# Altium PCB KUOZHAN.PCBDOC (part 14 of 21)
Units mm, origin at the board's own origin, x right, y up, seen from the top; angles counter-clockwise.
Board outline 165.51 x 116.38 mm, 2 copper layers (Top Layer, Bottom Layer); 171 components, 245 nets, 894 pads, 298 vias.
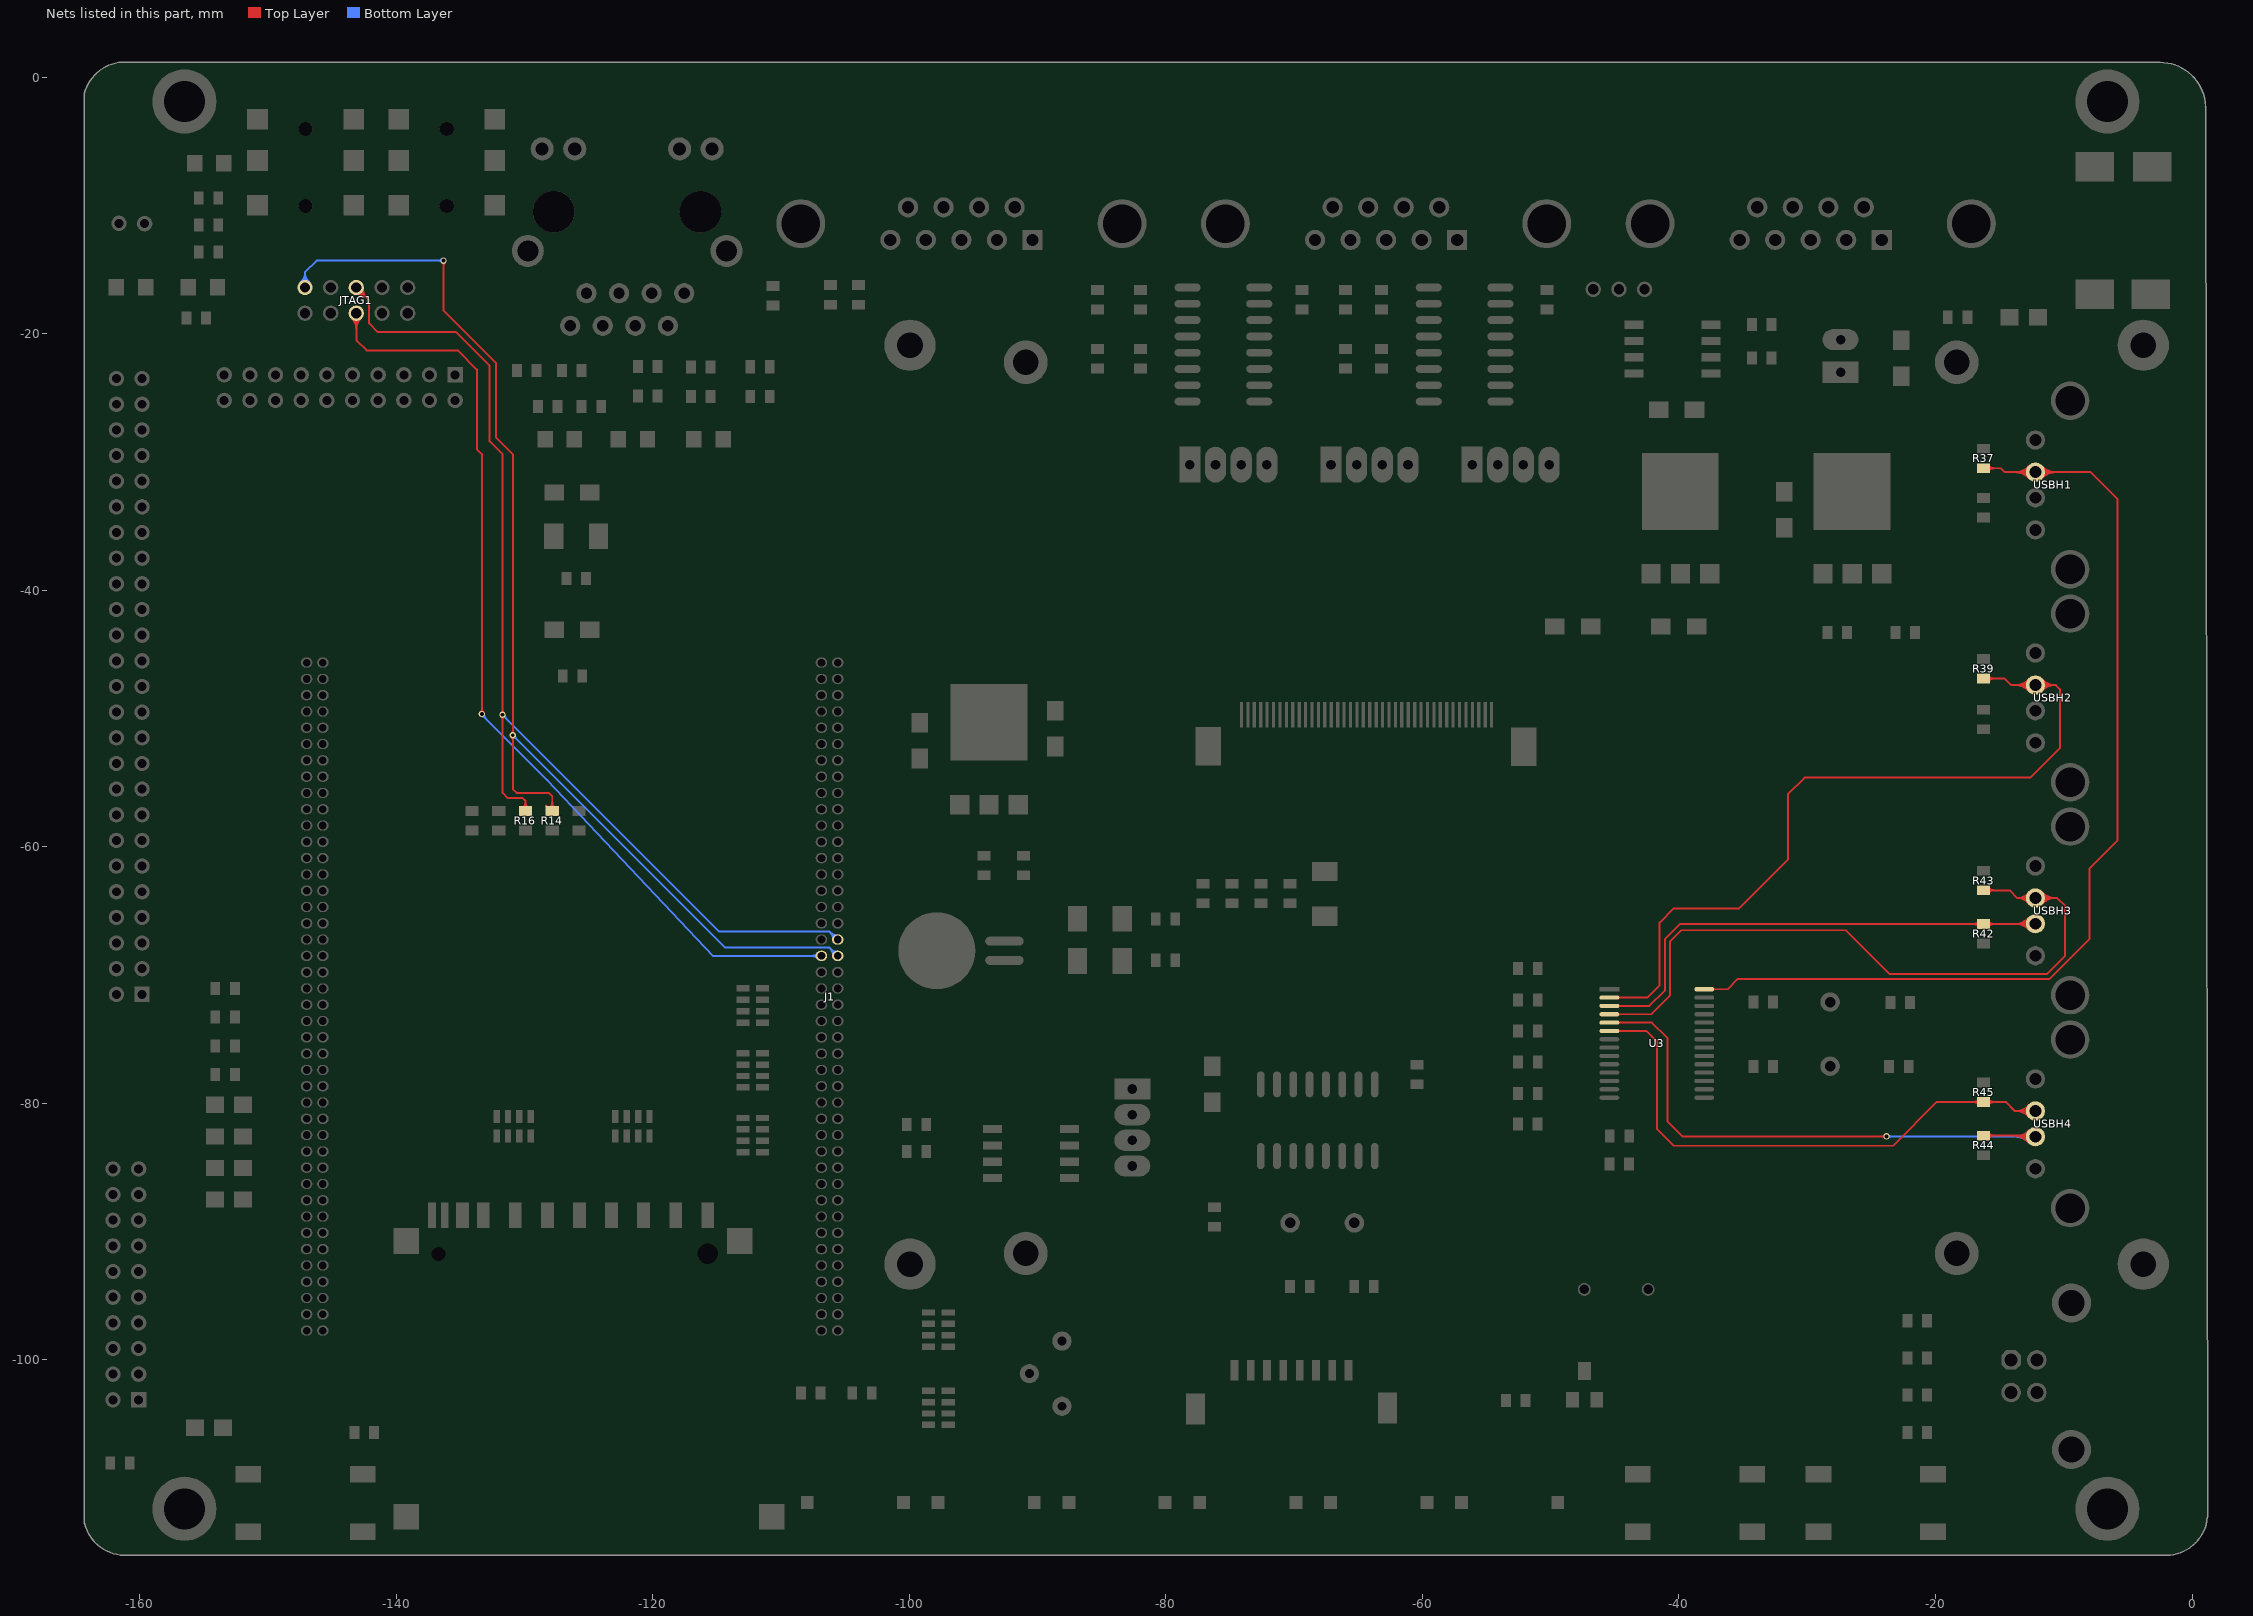
[diagram p14: the nets of this part, all layers, seen from the top]

## Via types
v1: diameter 0.5, hole 0.3, Top Layer to Bottom Layer, 272 vias
v2: diameter 0.6, hole 0.3, Top Layer to Bottom Layer, 24 vias
v3: diameter 0.9, hole 0.9, Top Layer to Bottom Layer, 2 vias

## Nets (pads, with @x,y where several pads share a name; then routed paths per layer and width w, separated by ;. In a path a pad name is that pad's centre, name@x,y a point inside that pad or via, vN(x,y) a via of type N, cw(c..) or ccw(c..) an arc to the next point about the centre after c; other vN are vias at no path point) (continued)
SUB_DM3: R42.1 U3.3 USBH3.2 | length 81.3
  Top Layer w0.15: U3.3@-45.35,-72.4 -42.3,-72.4 -41.1,-71.2 -41.1,-67.2 -39.913,-66.013 -26.713,-66.013 R42.1@-16.24,-66.013 -12.235,-66.013 USBH3.2@-12.213,-65.991 ; U3.3@-44.751,-72.464 cw(c-44.598,-72.617) -44.598,-72.4 cw(c-44.598,-72.183) U3.3@-44.751,-72.336 ; U3.3@-44.746,-72.464 cw(c-44.593,-72.617) -44.593,-72.4 cw(c-44.593,-72.183) U3.3@-44.746,-72.336 ; U3.3@-44.801,-72.464 cw(c-44.648,-72.617) -44.648,-72.4 ; U3.3@-44.801,-72.464 cw(c-44.648,-72.617) -44.648,-72.4 ; U3.3@-44.801,-72.464 cw(c-44.648,-72.617) -44.648,-72.4 ; U3.3@-44.801,-72.336 ccw(c-44.648,-72.183) -44.648,-72.4 ; U3.3@-44.801,-72.336 ccw(c-44.648,-72.183) -44.648,-72.4 ; U3.3@-44.801,-72.336 ccw(c-44.648,-72.183) -44.648,-72.4 ; -17.106,-66.013 cw(c-17.106,-66.751) R42.1@-16.584,-66.229 ; -17.106,-66.013 ccw(c-17.106,-65.274) R42.1@-16.584,-65.796 ; -17.106,-66.013 cw(c-17.106,-66.751) R42.1@-16.584,-66.229 ; -17.106,-66.013 ccw(c-17.106,-65.274) R42.1@-16.584,-65.796 ; -17.106,-66.013 cw(c-17.106,-66.751) R42.1@-16.584,-66.229 ; -17.106,-66.013 ccw(c-17.106,-65.274) R42.1@-16.584,-65.796 ; -17.106,-66.013 cw(c-17.106,-66.751) R42.1@-16.584,-66.229 ; -17.106,-66.013 ccw(c-17.106,-65.274) R42.1@-16.584,-65.796 ; -17.106,-66.013 ccw(c-17.106,-65.274) R42.1@-16.584,-65.796 ; -17.106,-66.013 cw(c-17.106,-66.751) R42.1@-16.584,-66.229 ; R42.1@-15.897,-66.229 cw(c-15.375,-66.751) -15.375,-66.013 ; R42.1@-15.897,-66.229 cw(c-15.375,-66.751) -15.375,-66.013 ; R42.1@-15.897,-66.229 cw(c-15.375,-66.751) -15.375,-66.013 ; R42.1@-15.897,-66.229 cw(c-15.375,-66.751) -15.375,-66.013 ; R42.1@-15.897,-66.229 cw(c-15.375,-66.751) -15.375,-66.013 ; R42.1@-15.897,-65.796 ccw(c-15.375,-65.274) -15.375,-66.013 ; R42.1@-15.897,-65.796 ccw(c-15.375,-65.274) -15.375,-66.013 ; R42.1@-15.897,-65.796 ccw(c-15.375,-65.274) -15.375,-66.013 ; R42.1@-15.897,-65.796 ccw(c-15.375,-65.274) -15.375,-66.013 ; R42.1@-15.897,-65.796 ccw(c-15.375,-65.274) -15.375,-66.013 ; -13.895,-66.013 ccw(c-13.895,-64.31) USBH3.2@-12.691,-65.514 ; -13.895,-66.013 ccw(c-13.895,-64.31) USBH3.2@-12.691,-65.514 ; -13.895,-66.013 ccw(c-13.895,-64.31) USBH3.2@-12.691,-65.514 ; -13.895,-66.013 ccw(c-13.895,-64.31) USBH3.2@-12.691,-65.514 ; -13.895,-66.013 ccw(c-13.895,-64.31) USBH3.2@-12.691,-65.514 ; -13.791,-66.013 cw(c-13.791,-67.569) USBH3.2@-12.691,-66.469 ; -13.791,-66.013 cw(c-13.791,-67.569) USBH3.2@-12.691,-66.469 ; -13.791,-66.013 cw(c-13.791,-67.569) USBH3.2@-12.691,-66.469 ; -13.791,-66.013 cw(c-13.791,-67.569) USBH3.2@-12.691,-66.469 ; -13.791,-66.013 cw(c-13.791,-67.569) USBH3.2@-12.691,-66.469 ; -13.533,-66.013 ccw(c-13.533,-64.672) USBH3.2@-12.585,-65.62 ; -13.533,-66.013 ccw(c-13.533,-64.672) USBH3.2@-12.585,-65.62 ; -13.533,-66.013 ccw(c-13.533,-64.672) USBH3.2@-12.585,-65.62 ; -13.533,-66.013 ccw(c-13.533,-64.672) USBH3.2@-12.585,-65.62 ; -13.533,-66.013 ccw(c-13.533,-64.672) USBH3.2@-12.585,-65.62 ; -13.429,-66.013 cw(c-13.429,-67.207) USBH3.2@-12.585,-66.362 ; -13.429,-66.013 cw(c-13.429,-67.207) USBH3.2@-12.585,-66.362 ; -13.429,-66.013 cw(c-13.429,-67.207) USBH3.2@-12.585,-66.362 ; -13.429,-66.013 cw(c-13.429,-67.207) USBH3.2@-12.585,-66.362 ; -13.429,-66.013 cw(c-13.429,-67.207) USBH3.2@-12.585,-66.362 ; -13.17,-66.013 ccw(c-13.17,-65.034) USBH3.2@-12.479,-65.726 ; -13.17,-66.013 ccw(c-13.17,-65.034) USBH3.2@-12.479,-65.726 ; -13.17,-66.013 ccw(c-13.17,-65.034) USBH3.2@-12.479,-65.726 ; -13.17,-66.013 ccw(c-13.17,-65.034) USBH3.2@-12.479,-65.726 ; -13.17,-66.013 ccw(c-13.17,-65.034) USBH3.2@-12.479,-65.726 ; -13.067,-66.013 cw(c-13.067,-66.845) USBH3.2@-12.479,-66.256 ; -13.067,-66.013 cw(c-13.067,-66.845) USBH3.2@-12.479,-66.256 ; -13.067,-66.013 cw(c-13.067,-66.845) USBH3.2@-12.479,-66.256 ; -13.067,-66.013 cw(c-13.067,-66.845) USBH3.2@-12.479,-66.256 ; -13.067,-66.013 cw(c-13.067,-66.845) USBH3.2@-12.479,-66.256
SUB_DM4: R44.1 U3.5 USBH4.2 | length 115.7
  Top Layer w0.15: U3.5@-45.35,-73.7 -42.1,-73.7 -40.9,-74.9 -40.9,-81.4 -39.726,-82.574 v1(-23.817,-82.574) ; U3.5@-44.751,-73.764 cw(c-44.598,-73.917) -44.598,-73.7 cw(c-44.598,-73.483) U3.5@-44.751,-73.636 ; U3.5@-44.746,-73.764 cw(c-44.593,-73.917) -44.593,-73.7 cw(c-44.593,-73.483) U3.5@-44.746,-73.636 ; v1@-23.906,-82.662 ccw(c-24.119,-82.876) -24.119,-82.574 ccw(c-24.119,-82.272) v1@-23.906,-82.485 ; R44.1@-16.24,-82.513 -12.292,-82.513 USBH4.2@-12.213,-82.591 ; U3.5@-44.801,-73.764 cw(c-44.648,-73.917) -44.648,-73.7 ; U3.5@-44.801,-73.764 cw(c-44.648,-73.917) -44.648,-73.7 ; U3.5@-44.801,-73.764 cw(c-44.648,-73.917) -44.648,-73.7 ; U3.5@-44.801,-73.636 ccw(c-44.648,-73.483) -44.648,-73.7 ; U3.5@-44.801,-73.636 ccw(c-44.648,-73.483) -44.648,-73.7 ; U3.5@-44.801,-73.636 ccw(c-44.648,-73.483) -44.648,-73.7 ; -24.24,-82.574 cw(c-24.24,-82.996) v1@-23.941,-82.697 ; -24.24,-82.574 ccw(c-24.24,-82.151) v1@-23.941,-82.45 ; -24.24,-82.574 cw(c-24.24,-82.996) v1@-23.941,-82.697 ; -24.24,-82.574 ccw(c-24.24,-82.151) v1@-23.941,-82.45 ; -24.24,-82.574 cw(c-24.24,-82.996) v1@-23.941,-82.697 ; -24.24,-82.574 ccw(c-24.24,-82.151) v1@-23.941,-82.45 ; -24.24,-82.574 ccw(c-24.24,-82.151) v1@-23.941,-82.45 ; -24.24,-82.574 cw(c-24.24,-82.996) v1@-23.941,-82.697 ; R44.1@-15.897,-82.729 cw(c-15.375,-83.251) -15.375,-82.513 ; R44.1@-15.897,-82.729 cw(c-15.375,-83.251) -15.375,-82.513 ; R44.1@-15.897,-82.729 cw(c-15.375,-83.251) -15.375,-82.513 ; R44.1@-15.897,-82.729 cw(c-15.375,-83.251) -15.375,-82.513 ; R44.1@-15.897,-82.729 cw(c-15.375,-83.251) -15.375,-82.513 ; R44.1@-15.897,-82.296 ccw(c-15.375,-81.774) -15.375,-82.513 ; R44.1@-15.897,-82.296 ccw(c-15.375,-81.774) -15.375,-82.513 ; R44.1@-15.897,-82.296 ccw(c-15.375,-81.774) -15.375,-82.513 ; R44.1@-15.897,-82.296 ccw(c-15.375,-81.774) -15.375,-82.513 ; R44.1@-15.897,-82.296 ccw(c-15.375,-81.774) -15.375,-82.513 ; -14.033,-82.513 cw(c-14.033,-84.411) USBH4.2@-12.691,-83.069 ; -14.033,-82.513 cw(c-14.033,-84.411) USBH4.2@-12.691,-83.069 ; -14.033,-82.513 cw(c-14.033,-84.411) USBH4.2@-12.691,-83.069 ; -14.033,-82.513 cw(c-14.033,-84.411) USBH4.2@-12.691,-83.069 ; -14.033,-82.513 cw(c-14.033,-84.411) USBH4.2@-12.691,-83.069 ; -13.671,-82.513 cw(c-13.671,-84.048) USBH4.2@-12.585,-82.962 ; -13.671,-82.513 cw(c-13.671,-84.048) USBH4.2@-12.585,-82.962 ; -13.671,-82.513 cw(c-13.671,-84.048) USBH4.2@-12.585,-82.962 ; -13.671,-82.513 cw(c-13.671,-84.048) USBH4.2@-12.585,-82.962 ; -13.671,-82.513 cw(c-13.671,-84.048) USBH4.2@-12.585,-82.962 ; -13.653,-82.513 ccw(c-13.653,-81.151) USBH4.2@-12.691,-82.114 ; -13.653,-82.513 ccw(c-13.653,-81.151) USBH4.2@-12.691,-82.114 ; -13.653,-82.513 ccw(c-13.653,-81.151) USBH4.2@-12.691,-82.114 ; -13.653,-82.513 ccw(c-13.653,-81.151) USBH4.2@-12.691,-82.114 ; -13.653,-82.513 ccw(c-13.653,-81.151) USBH4.2@-12.691,-82.114 ; -13.309,-82.513 cw(c-13.309,-83.686) USBH4.2@-12.479,-82.856 ; -13.309,-82.513 cw(c-13.309,-83.686) USBH4.2@-12.479,-82.856 ; -13.309,-82.513 cw(c-13.309,-83.686) USBH4.2@-12.479,-82.856 ; -13.309,-82.513 cw(c-13.309,-83.686) USBH4.2@-12.479,-82.856 ; -13.309,-82.513 cw(c-13.309,-83.686) USBH4.2@-12.479,-82.856 ; -13.291,-82.513 ccw(c-13.291,-81.514) USBH4.2@-12.585,-82.22 ; -13.291,-82.513 ccw(c-13.291,-81.514) USBH4.2@-12.585,-82.22 ; -13.291,-82.513 ccw(c-13.291,-81.514) USBH4.2@-12.585,-82.22 ; -13.291,-82.513 ccw(c-13.291,-81.514) USBH4.2@-12.585,-82.22 ; -13.291,-82.513 ccw(c-13.291,-81.514) USBH4.2@-12.585,-82.22
  Bottom Layer w0.15: v1@-23.817,-82.591 -15.787,-82.591 USBH4.2@-12.213,-82.591 ; v1@-23.729,-82.662 cw(c-23.558,-82.833) -23.558,-82.591 ; v1@-23.729,-82.485 ccw(c-23.474,-82.23) -23.474,-82.591 ; v1@-23.694,-82.697 cw(c-23.437,-82.954) -23.437,-82.591 ; v1@-23.694,-82.697 cw(c-23.437,-82.954) -23.437,-82.591 ; v1@-23.694,-82.697 cw(c-23.437,-82.954) -23.437,-82.591 ; v1@-23.694,-82.697 cw(c-23.437,-82.954) -23.437,-82.591 ; v1@-23.694,-82.45 ccw(c-23.353,-82.109) -23.353,-82.591 ; v1@-23.694,-82.45 ccw(c-23.353,-82.109) -23.353,-82.591 ; v1@-23.694,-82.45 ccw(c-23.353,-82.109) -23.353,-82.591 ; v1@-23.694,-82.45 ccw(c-23.353,-82.109) -23.353,-82.591 ; -13.843,-82.591 cw(c-13.843,-84.221) USBH4.2@-12.691,-83.069 ; -13.843,-82.591 ccw(c-13.843,-80.962) USBH4.2@-12.691,-82.114 ; -13.843,-82.591 cw(c-13.843,-84.221) USBH4.2@-12.691,-83.069 ; -13.843,-82.591 ccw(c-13.843,-80.962) USBH4.2@-12.691,-82.114 ; -13.843,-82.591 cw(c-13.843,-84.221) USBH4.2@-12.691,-83.069 ; -13.843,-82.591 ccw(c-13.843,-80.962) USBH4.2@-12.691,-82.114 ; -13.843,-82.591 cw(c-13.843,-84.221) USBH4.2@-12.691,-83.069 ; -13.843,-82.591 ccw(c-13.843,-80.962) USBH4.2@-12.691,-82.114 ; -13.843,-82.591 ccw(c-13.843,-80.962) USBH4.2@-12.691,-82.114 ; -13.843,-82.591 cw(c-13.843,-84.221) USBH4.2@-12.691,-83.069 ; -13.481,-82.591 cw(c-13.481,-83.859) USBH4.2@-12.585,-82.962 ; -13.481,-82.591 ccw(c-13.481,-81.324) USBH4.2@-12.585,-82.22 ; -13.481,-82.591 cw(c-13.481,-83.859) USBH4.2@-12.585,-82.962 ; -13.481,-82.591 ccw(c-13.481,-81.324) USBH4.2@-12.585,-82.22 ; -13.481,-82.591 cw(c-13.481,-83.859) USBH4.2@-12.585,-82.962 ; -13.481,-82.591 ccw(c-13.481,-81.324) USBH4.2@-12.585,-82.22 ; -13.481,-82.591 cw(c-13.481,-83.859) USBH4.2@-12.585,-82.962 ; -13.481,-82.591 ccw(c-13.481,-81.324) USBH4.2@-12.585,-82.22 ; -13.481,-82.591 ccw(c-13.481,-81.324) USBH4.2@-12.585,-82.22 ; -13.481,-82.591 cw(c-13.481,-83.859) USBH4.2@-12.585,-82.962 ; -13.119,-82.591 cw(c-13.119,-83.497) USBH4.2@-12.479,-82.856 ; -13.119,-82.591 ccw(c-13.119,-81.686) USBH4.2@-12.479,-82.326 ; -13.119,-82.591 cw(c-13.119,-83.497) USBH4.2@-12.479,-82.856 ; -13.119,-82.591 ccw(c-13.119,-81.686) USBH4.2@-12.479,-82.326 ; -13.119,-82.591 cw(c-13.119,-83.497) USBH4.2@-12.479,-82.856 ; -13.119,-82.591 ccw(c-13.119,-81.686) USBH4.2@-12.479,-82.326 ; -13.119,-82.591 cw(c-13.119,-83.497) USBH4.2@-12.479,-82.856 ; -13.119,-82.591 ccw(c-13.119,-81.686) USBH4.2@-12.479,-82.326 ; -13.119,-82.591 ccw(c-13.119,-81.686) USBH4.2@-12.479,-82.326 ; -13.119,-82.591 cw(c-13.119,-83.497) USBH4.2@-12.479,-82.856
SUB_DP1: R37.1 U3.28 USBH1.3 | length 145.6
  Top Layer w0.15: U3.28@-38.1,-71.1 -36.2,-71.1 -35.4,-70.3 -11.1,-70.3 -8,-67.2 -8,-61.7 -5.8,-59.5 -5.8,-32.9 -7.909,-30.791 USBH1.3@-12.213,-30.791 -14.609,-30.791 -14.913,-30.487 R37.1@-16.241,-30.487 ; U3.28@-37.406,-71.164 cw(c-37.253,-71.317) -37.253,-71.1 cw(c-37.253,-70.883) U3.28@-37.406,-71.036 ; U3.28@-37.351,-71.164 cw(c-37.198,-71.317) -37.198,-71.1 cw(c-37.198,-70.883) U3.28@-37.351,-71.036 ; U3.28@-37.551,-71.164 cw(c-37.398,-71.317) U3.28@-37.398,-71.1 ; U3.28@-37.551,-71.164 cw(c-37.398,-71.317) U3.28@-37.398,-71.1 ; U3.28@-37.551,-71.164 cw(c-37.398,-71.317) U3.28@-37.398,-71.1 ; U3.28@-37.551,-71.036 ccw(c-37.398,-70.883) U3.28@-37.398,-71.1 ; U3.28@-37.551,-71.036 ccw(c-37.398,-70.883) U3.28@-37.398,-71.1 ; U3.28@-37.551,-71.036 ccw(c-37.398,-70.883) U3.28@-37.398,-71.1 ; R37.1@-15.898,-30.704 cw(c-15.376,-31.226) -15.376,-30.487 ; R37.1@-15.898,-30.704 cw(c-15.376,-31.226) -15.376,-30.487 ; R37.1@-15.898,-30.704 cw(c-15.376,-31.226) -15.376,-30.487 ; R37.1@-15.898,-30.704 cw(c-15.376,-31.226) -15.376,-30.487 ; R37.1@-15.898,-30.704 cw(c-15.376,-31.226) -15.376,-30.487 ; R37.1@-15.898,-30.271 ccw(c-15.376,-29.749) -15.376,-30.487 ; R37.1@-15.898,-30.271 ccw(c-15.376,-29.749) -15.376,-30.487 ; R37.1@-15.898,-30.271 ccw(c-15.376,-29.749) -15.376,-30.487 ; R37.1@-15.898,-30.271 ccw(c-15.376,-29.749) -15.376,-30.487 ; R37.1@-15.898,-30.271 ccw(c-15.376,-29.749) -15.376,-30.487 ; -13.843,-30.791 cw(c-13.843,-32.421) USBH1.3@-12.691,-31.269 ; -13.843,-30.791 ccw(c-13.843,-29.162) USBH1.3@-12.691,-30.314 ; -13.843,-30.791 cw(c-13.843,-32.421) USBH1.3@-12.691,-31.269 ; -13.843,-30.791 ccw(c-13.843,-29.162) USBH1.3@-12.691,-30.314 ; -13.843,-30.791 cw(c-13.843,-32.421) USBH1.3@-12.691,-31.269 ; -13.843,-30.791 ccw(c-13.843,-29.162) USBH1.3@-12.691,-30.314 ; -13.843,-30.791 cw(c-13.843,-32.421) USBH1.3@-12.691,-31.269 ; -13.843,-30.791 ccw(c-13.843,-29.162) USBH1.3@-12.691,-30.314 ; -13.843,-30.791 ccw(c-13.843,-29.162) USBH1.3@-12.691,-30.314 ; -13.843,-30.791 cw(c-13.843,-32.421) USBH1.3@-12.691,-31.269 ; -13.481,-30.791 cw(c-13.481,-32.059) USBH1.3@-12.585,-31.162 ; -13.481,-30.791 ccw(c-13.481,-29.524) USBH1.3@-12.585,-30.42 ; -13.481,-30.791 cw(c-13.481,-32.059) USBH1.3@-12.585,-31.162 ; -13.481,-30.791 ccw(c-13.481,-29.524) USBH1.3@-12.585,-30.42 ; -13.481,-30.791 cw(c-13.481,-32.059) USBH1.3@-12.585,-31.162 ; -13.481,-30.791 ccw(c-13.481,-29.524) USBH1.3@-12.585,-30.42 ; -13.481,-30.791 cw(c-13.481,-32.059) USBH1.3@-12.585,-31.162 ; -13.481,-30.791 ccw(c-13.481,-29.524) USBH1.3@-12.585,-30.42 ; -13.481,-30.791 ccw(c-13.481,-29.524) USBH1.3@-12.585,-30.42 ; -13.481,-30.791 cw(c-13.481,-32.059) USBH1.3@-12.585,-31.162 ; -13.119,-30.791 cw(c-13.119,-31.697) USBH1.3@-12.479,-31.056 ; -13.119,-30.791 ccw(c-13.119,-29.886) USBH1.3@-12.479,-30.526 ; -13.119,-30.791 cw(c-13.119,-31.697) USBH1.3@-12.479,-31.056 ; -13.119,-30.791 ccw(c-13.119,-29.886) USBH1.3@-12.479,-30.526 ; -13.119,-30.791 cw(c-13.119,-31.697) USBH1.3@-12.479,-31.056 ; -13.119,-30.791 ccw(c-13.119,-29.886) USBH1.3@-12.479,-30.526 ; -13.119,-30.791 cw(c-13.119,-31.697) USBH1.3@-12.479,-31.056 ; -13.119,-30.791 ccw(c-13.119,-29.886) USBH1.3@-12.479,-30.526 ; -13.119,-30.791 ccw(c-13.119,-29.886) USBH1.3@-12.479,-30.526 ; -13.119,-30.791 cw(c-13.119,-31.697) USBH1.3@-12.479,-31.056 ; USBH1.3@-11.948,-31.056 cw(c-11.308,-31.697) -11.308,-30.791 ; USBH1.3@-11.948,-31.056 cw(c-11.308,-31.697) -11.308,-30.791 ; USBH1.3@-11.948,-31.056 cw(c-11.308,-31.697) -11.308,-30.791 ; USBH1.3@-11.948,-31.056 cw(c-11.308,-31.697) -11.308,-30.791 ; USBH1.3@-11.948,-31.056 cw(c-11.308,-31.697) -11.308,-30.791 ; USBH1.3@-11.948,-30.526 ccw(c-11.308,-29.886) -11.308,-30.791 ; USBH1.3@-11.948,-30.526 ccw(c-11.308,-29.886) -11.308,-30.791 ; USBH1.3@-11.948,-30.526 ccw(c-11.308,-29.886) -11.308,-30.791 ; USBH1.3@-11.948,-30.526 ccw(c-11.308,-29.886) -11.308,-30.791 ; USBH1.3@-11.948,-30.526 ccw(c-11.308,-29.886) -11.308,-30.791 ; USBH1.3@-11.842,-31.162 cw(c-10.946,-32.059) -10.946,-30.791 ; USBH1.3@-11.842,-31.162 cw(c-10.946,-32.059) -10.946,-30.791 ; USBH1.3@-11.842,-31.162 cw(c-10.946,-32.059) -10.946,-30.791 ; USBH1.3@-11.842,-31.162 cw(c-10.946,-32.059) -10.946,-30.791 ; USBH1.3@-11.842,-31.162 cw(c-10.946,-32.059) -10.946,-30.791 ; USBH1.3@-11.842,-30.42 ccw(c-10.946,-29.524) -10.946,-30.791 ; USBH1.3@-11.842,-30.42 ccw(c-10.946,-29.524) -10.946,-30.791 ; USBH1.3@-11.842,-30.42 ccw(c-10.946,-29.524) -10.946,-30.791 ; USBH1.3@-11.842,-30.42 ccw(c-10.946,-29.524) -10.946,-30.791 ; USBH1.3@-11.842,-30.42 ccw(c-10.946,-29.524) -10.946,-30.791 ; USBH1.3@-11.736,-31.269 cw(c-10.584,-32.421) -10.584,-30.791 ; USBH1.3@-11.736,-31.269 cw(c-10.584,-32.421) -10.584,-30.791 ; USBH1.3@-11.736,-31.269 cw(c-10.584,-32.421) -10.584,-30.791 ; USBH1.3@-11.736,-31.269 cw(c-10.584,-32.421) -10.584,-30.791 ; USBH1.3@-11.736,-31.269 cw(c-10.584,-32.421) -10.584,-30.791 ; USBH1.3@-11.736,-30.314 ccw(c-10.584,-29.162) -10.584,-30.791 ; USBH1.3@-11.736,-30.314 ccw(c-10.584,-29.162) -10.584,-30.791 ; USBH1.3@-11.736,-30.314 ccw(c-10.584,-29.162) -10.584,-30.791 ; USBH1.3@-11.736,-30.314 ccw(c-10.584,-29.162) -10.584,-30.791 ; USBH1.3@-11.736,-30.314 ccw(c-10.584,-29.162) -10.584,-30.791
SUB_DP2: R39.1 U3.2 USBH2.3 | length 126.4
  Top Layer w0.15: U3.2@-45.35,-71.75 -42.45,-71.75 -41.5,-70.8 -41.5,-65.9 -40.4,-64.8 -35.3,-64.8 -31.5,-61 -31.5,-55.9 -30.2,-54.6 -12.6,-54.6 -10.3,-52.3 -10.3,-47.7 -10.609,-47.391 ; U3.2@-44.751,-71.814 cw(c-44.598,-71.967) -44.598,-71.75 cw(c-44.598,-71.533) U3.2@-44.751,-71.686 ; U3.2@-44.746,-71.814 cw(c-44.593,-71.967) -44.593,-71.75 cw(c-44.593,-71.533) U3.2@-44.746,-71.686 ; R39.1@-16.241,-46.887 -14.613,-46.887 -14.109,-47.391 USBH2.3@-12.213,-47.391 -10.609,-47.391 ; U3.2@-44.801,-71.814 cw(c-44.648,-71.967) -44.648,-71.75 ; U3.2@-44.801,-71.814 cw(c-44.648,-71.967) -44.648,-71.75 ; U3.2@-44.801,-71.814 cw(c-44.648,-71.967) -44.648,-71.75 ; U3.2@-44.801,-71.686 ccw(c-44.648,-71.533) -44.648,-71.75 ; U3.2@-44.801,-71.686 ccw(c-44.648,-71.533) -44.648,-71.75 ; U3.2@-44.801,-71.686 ccw(c-44.648,-71.533) -44.648,-71.75 ; R39.1@-15.898,-47.104 cw(c-15.376,-47.626) -15.376,-46.887 ; R39.1@-15.898,-47.104 cw(c-15.376,-47.626) -15.376,-46.887 ; R39.1@-15.898,-47.104 cw(c-15.376,-47.626) -15.376,-46.887 ; R39.1@-15.898,-47.104 cw(c-15.376,-47.626) -15.376,-46.887 ; R39.1@-15.898,-47.104 cw(c-15.376,-47.626) -15.376,-46.887 ; R39.1@-15.898,-46.671 ccw(c-15.376,-46.149) -15.376,-46.887 ; R39.1@-15.898,-46.671 ccw(c-15.376,-46.149) -15.376,-46.887 ; R39.1@-15.898,-46.671 ccw(c-15.376,-46.149) -15.376,-46.887 ; R39.1@-15.898,-46.671 ccw(c-15.376,-46.149) -15.376,-46.887 ; R39.1@-15.898,-46.671 ccw(c-15.376,-46.149) -15.376,-46.887 ; -13.843,-47.391 cw(c-13.843,-49.021) USBH2.3@-12.691,-47.869 ; -13.843,-47.391 ccw(c-13.843,-45.762) USBH2.3@-12.691,-46.914 ; -13.843,-47.391 cw(c-13.843,-49.021) USBH2.3@-12.691,-47.869 ; -13.843,-47.391 ccw(c-13.843,-45.762) USBH2.3@-12.691,-46.914 ; -13.843,-47.391 cw(c-13.843,-49.021) USBH2.3@-12.691,-47.869 ; -13.843,-47.391 ccw(c-13.843,-45.762) USBH2.3@-12.691,-46.914 ; -13.843,-47.391 cw(c-13.843,-49.021) USBH2.3@-12.691,-47.869 ; -13.843,-47.391 ccw(c-13.843,-45.762) USBH2.3@-12.691,-46.914 ; -13.843,-47.391 ccw(c-13.843,-45.762) USBH2.3@-12.691,-46.914 ; -13.843,-47.391 cw(c-13.843,-49.021) USBH2.3@-12.691,-47.869 ; -13.481,-47.391 cw(c-13.481,-48.659) USBH2.3@-12.585,-47.762 ; -13.481,-47.391 ccw(c-13.481,-46.124) USBH2.3@-12.585,-47.02 ; -13.481,-47.391 cw(c-13.481,-48.659) USBH2.3@-12.585,-47.762 ; -13.481,-47.391 ccw(c-13.481,-46.124) USBH2.3@-12.585,-47.02 ; -13.481,-47.391 cw(c-13.481,-48.659) USBH2.3@-12.585,-47.762 ; -13.481,-47.391 ccw(c-13.481,-46.124) USBH2.3@-12.585,-47.02 ; -13.481,-47.391 cw(c-13.481,-48.659) USBH2.3@-12.585,-47.762 ; -13.481,-47.391 ccw(c-13.481,-46.124) USBH2.3@-12.585,-47.02 ; -13.481,-47.391 ccw(c-13.481,-46.124) USBH2.3@-12.585,-47.02 ; -13.481,-47.391 cw(c-13.481,-48.659) USBH2.3@-12.585,-47.762 ; -13.119,-47.391 cw(c-13.119,-48.297) USBH2.3@-12.479,-47.656 ; -13.119,-47.391 ccw(c-13.119,-46.486) USBH2.3@-12.479,-47.126 ; -13.119,-47.391 cw(c-13.119,-48.297) USBH2.3@-12.479,-47.656 ; -13.119,-47.391 ccw(c-13.119,-46.486) USBH2.3@-12.479,-47.126 ; -13.119,-47.391 cw(c-13.119,-48.297) USBH2.3@-12.479,-47.656 ; -13.119,-47.391 ccw(c-13.119,-46.486) USBH2.3@-12.479,-47.126 ; -13.119,-47.391 cw(c-13.119,-48.297) USBH2.3@-12.479,-47.656 ; -13.119,-47.391 ccw(c-13.119,-46.486) USBH2.3@-12.479,-47.126 ; -13.119,-47.391 ccw(c-13.119,-46.486) USBH2.3@-12.479,-47.126 ; -13.119,-47.391 cw(c-13.119,-48.297) USBH2.3@-12.479,-47.656 ; USBH2.3@-11.945,-47.653 cw(c-11.322,-48.263) -11.322,-47.391 ; USBH2.3@-11.945,-47.653 cw(c-11.322,-48.263) -11.322,-47.391 ; USBH2.3@-11.945,-47.653 cw(c-11.322,-48.263) -11.322,-47.391 ; USBH2.3@-11.945,-47.653 cw(c-11.322,-48.263) -11.322,-47.391 ; USBH2.3@-11.945,-47.653 cw(c-11.322,-48.263) -11.322,-47.391 ; USBH2.3@-11.945,-47.129 ccw(c-11.322,-46.519) -11.322,-47.391 ; USBH2.3@-11.945,-47.129 ccw(c-11.322,-46.519) -11.322,-47.391 ; USBH2.3@-11.945,-47.129 ccw(c-11.322,-46.519) -11.322,-47.391 ; USBH2.3@-11.945,-47.129 ccw(c-11.322,-46.519) -11.322,-47.391 ; USBH2.3@-11.945,-47.129 ccw(c-11.322,-46.519) -11.322,-47.391 ; USBH2.3@-11.838,-47.758 cw(c-10.965,-48.612) -10.965,-47.391 ; USBH2.3@-11.838,-47.758 cw(c-10.965,-48.612) -10.965,-47.391 ; USBH2.3@-11.838,-47.758 cw(c-10.965,-48.612) -10.965,-47.391 ; USBH2.3@-11.838,-47.758 cw(c-10.965,-48.612) -10.965,-47.391 ; USBH2.3@-11.838,-47.758 cw(c-10.965,-48.612) -10.965,-47.391 ; USBH2.3@-11.838,-47.024 ccw(c-10.965,-46.17) -10.965,-47.391 ; USBH2.3@-11.838,-47.024 ccw(c-10.965,-46.17) -10.965,-47.391 ; USBH2.3@-11.838,-47.024 ccw(c-10.965,-46.17) -10.965,-47.391 ; USBH2.3@-11.838,-47.024 ccw(c-10.965,-46.17) -10.965,-47.391 ; USBH2.3@-11.838,-47.024 ccw(c-10.965,-46.17) -10.965,-47.391 ; USBH2.3@-11.731,-47.863 cw(c-10.609,-48.961) -10.609,-47.391 ; USBH2.3@-11.731,-47.863 cw(c-10.609,-48.961) -10.609,-47.391 ; USBH2.3@-11.731,-47.863 cw(c-10.609,-48.961) -10.609,-47.391 ; USBH2.3@-11.731,-47.863 cw(c-10.609,-48.961) -10.609,-47.391 ; USBH2.3@-11.731,-47.863 cw(c-10.609,-48.961) -10.609,-47.391 ; USBH2.3@-11.731,-46.919 ccw(c-10.609,-45.822) -10.609,-47.391 ; USBH2.3@-11.731,-46.919 ccw(c-10.609,-45.822) -10.609,-47.391 ; USBH2.3@-11.731,-46.919 ccw(c-10.609,-45.822) -10.609,-47.391 ; USBH2.3@-11.731,-46.919 ccw(c-10.609,-45.822) -10.609,-47.391 ; USBH2.3@-11.731,-46.919 ccw(c-10.609,-45.822) -10.609,-47.391
SUB_DP3: R43.1 U3.4 USBH3.3 | length 114
  Top Layer w0.15: U3.4@-45.35,-73.05 -42.15,-73.05 -40.7,-71.6 -40.7,-67.4 -39.8,-66.5 -27,-66.5 -23.6,-69.9 -11.3,-69.9 -9.9,-68.5 -9.9,-64.6 -10.509,-63.991 USBH3.3@-12.213,-63.991 -13.609,-63.991 ; U3.4@-44.751,-73.114 cw(c-44.598,-73.267) -44.598,-73.05 cw(c-44.598,-72.833) U3.4@-44.751,-72.986 ; U3.4@-44.746,-73.114 cw(c-44.593,-73.267) -44.593,-73.05 cw(c-44.593,-72.833) U3.4@-44.746,-72.986 ; R43.1@-16.241,-63.387 -14.213,-63.387 -13.609,-63.991 ; U3.4@-44.801,-73.114 cw(c-44.648,-73.267) -44.648,-73.05 ; U3.4@-44.801,-73.114 cw(c-44.648,-73.267) -44.648,-73.05 ; U3.4@-44.801,-73.114 cw(c-44.648,-73.267) -44.648,-73.05 ; U3.4@-44.801,-72.986 ccw(c-44.648,-72.833) -44.648,-73.05 ; U3.4@-44.801,-72.986 ccw(c-44.648,-72.833) -44.648,-73.05 ; U3.4@-44.801,-72.986 ccw(c-44.648,-72.833) -44.648,-73.05 ; R43.1@-15.898,-63.604 cw(c-15.376,-64.126) -15.376,-63.387 ; R43.1@-15.898,-63.604 cw(c-15.376,-64.126) -15.376,-63.387 ; R43.1@-15.898,-63.604 cw(c-15.376,-64.126) -15.376,-63.387 ; R43.1@-15.898,-63.604 cw(c-15.376,-64.126) -15.376,-63.387 ; R43.1@-15.898,-63.604 cw(c-15.376,-64.126) -15.376,-63.387 ; R43.1@-15.898,-63.171 ccw(c-15.376,-62.649) -15.376,-63.387 ; R43.1@-15.898,-63.171 ccw(c-15.376,-62.649) -15.376,-63.387 ; R43.1@-15.898,-63.171 ccw(c-15.376,-62.649) -15.376,-63.387 ; R43.1@-15.898,-63.171 ccw(c-15.376,-62.649) -15.376,-63.387 ; R43.1@-15.898,-63.171 ccw(c-15.376,-62.649) -15.376,-63.387 ; -13.609,-63.991 cw(c-13.609,-65.096) USBH3.3@-12.743,-64.41 ; -13.609,-63.991 ccw(c-13.609,-62.887) USBH3.3@-12.743,-63.572 ; -13.609,-63.991 cw(c-13.609,-65.096) USBH3.3@-12.743,-64.41 ; -13.609,-63.991 ccw(c-13.609,-62.887) USBH3.3@-12.743,-63.572 ; -13.609,-63.991 cw(c-13.609,-65.096) USBH3.3@-12.743,-64.41 ; -13.609,-63.991 ccw(c-13.609,-62.887) USBH3.3@-12.743,-63.572 ; -13.609,-63.991 cw(c-13.609,-65.096) USBH3.3@-12.743,-64.41 ; -13.609,-63.991 ccw(c-13.609,-62.887) USBH3.3@-12.743,-63.572 ; -13.609,-63.991 ccw(c-13.609,-62.887) USBH3.3@-12.743,-63.572 ; -13.609,-63.991 cw(c-13.609,-65.096) USBH3.3@-12.743,-64.41 ; -13.299,-63.991 cw(c-13.299,-64.85) USBH3.3@-12.625,-64.317 ; -13.299,-63.991 ccw(c-13.299,-63.132) USBH3.3@-12.625,-63.665 ; -13.299,-63.991 cw(c-13.299,-64.85) USBH3.3@-12.625,-64.317 ; -13.299,-63.991 ccw(c-13.299,-63.132) USBH3.3@-12.625,-63.665 ; -13.299,-63.991 cw(c-13.299,-64.85) USBH3.3@-12.625,-64.317 ; -13.299,-63.991 ccw(c-13.299,-63.132) USBH3.3@-12.625,-63.665 ; -13.299,-63.991 cw(c-13.299,-64.85) USBH3.3@-12.625,-64.317 ; -13.299,-63.991 ccw(c-13.299,-63.132) USBH3.3@-12.625,-63.665 ; -13.299,-63.991 ccw(c-13.299,-63.132) USBH3.3@-12.625,-63.665 ; -13.299,-63.991 cw(c-13.299,-64.85) USBH3.3@-12.625,-64.317 ; -12.989,-63.991 cw(c-12.989,-64.605) USBH3.3@-12.507,-64.224 ; -12.989,-63.991 ccw(c-12.989,-63.378) USBH3.3@-12.507,-63.758 ; -12.989,-63.991 cw(c-12.989,-64.605) USBH3.3@-12.507,-64.224 ; -12.989,-63.991 ccw(c-12.989,-63.378) USBH3.3@-12.507,-63.758 ; -12.989,-63.991 cw(c-12.989,-64.605) USBH3.3@-12.507,-64.224 ; -12.989,-63.991 ccw(c-12.989,-63.378) USBH3.3@-12.507,-63.758 ; -12.989,-63.991 cw(c-12.989,-64.605) USBH3.3@-12.507,-64.224 ; -12.989,-63.991 ccw(c-12.989,-63.378) USBH3.3@-12.507,-63.758 ; -12.989,-63.991 ccw(c-12.989,-63.378) USBH3.3@-12.507,-63.758 ; -12.989,-63.991 cw(c-12.989,-64.605) USBH3.3@-12.507,-64.224 ; USBH3.3@-11.948,-64.256 cw(c-11.308,-64.897) -11.308,-63.991 ; USBH3.3@-11.948,-64.256 cw(c-11.308,-64.897) -11.308,-63.991 ; USBH3.3@-11.948,-64.256 cw(c-11.308,-64.897) -11.308,-63.991 ; USBH3.3@-11.948,-64.256 cw(c-11.308,-64.897) -11.308,-63.991 ; USBH3.3@-11.948,-64.256 cw(c-11.308,-64.897) -11.308,-63.991 ; USBH3.3@-11.948,-63.726 ccw(c-11.308,-63.086) -11.308,-63.991 ; USBH3.3@-11.948,-63.726 ccw(c-11.308,-63.086) -11.308,-63.991 ; USBH3.3@-11.948,-63.726 ccw(c-11.308,-63.086) -11.308,-63.991 ; USBH3.3@-11.948,-63.726 ccw(c-11.308,-63.086) -11.308,-63.991 ; USBH3.3@-11.948,-63.726 ccw(c-11.308,-63.086) -11.308,-63.991 ; USBH3.3@-11.842,-64.362 cw(c-10.946,-65.259) -10.946,-63.991 ; USBH3.3@-11.842,-64.362 cw(c-10.946,-65.259) -10.946,-63.991 ; USBH3.3@-11.842,-64.362 cw(c-10.946,-65.259) -10.946,-63.991 ; USBH3.3@-11.842,-64.362 cw(c-10.946,-65.259) -10.946,-63.991 ; USBH3.3@-11.842,-64.362 cw(c-10.946,-65.259) -10.946,-63.991 ; USBH3.3@-11.842,-63.62 ccw(c-10.946,-62.724) -10.946,-63.991 ; USBH3.3@-11.842,-63.62 ccw(c-10.946,-62.724) -10.946,-63.991 ; USBH3.3@-11.842,-63.62 ccw(c-10.946,-62.724) -10.946,-63.991 ; USBH3.3@-11.842,-63.62 ccw(c-10.946,-62.724) -10.946,-63.991 ; USBH3.3@-11.842,-63.62 ccw(c-10.946,-62.724) -10.946,-63.991 ; USBH3.3@-11.736,-64.469 cw(c-10.584,-65.621) -10.584,-63.991 ; USBH3.3@-11.736,-64.469 cw(c-10.584,-65.621) -10.584,-63.991 ; USBH3.3@-11.736,-64.469 cw(c-10.584,-65.621) -10.584,-63.991 ; USBH3.3@-11.736,-64.469 cw(c-10.584,-65.621) -10.584,-63.991 ; USBH3.3@-11.736,-64.469 cw(c-10.584,-65.621) -10.584,-63.991 ; USBH3.3@-11.736,-63.514 ccw(c-10.584,-62.362) -10.584,-63.991 ; USBH3.3@-11.736,-63.514 ccw(c-10.584,-62.362) -10.584,-63.991 ; USBH3.3@-11.736,-63.514 ccw(c-10.584,-62.362) -10.584,-63.991 ; USBH3.3@-11.736,-63.514 ccw(c-10.584,-62.362) -10.584,-63.991 ; USBH3.3@-11.736,-63.514 ccw(c-10.584,-62.362) -10.584,-63.991
SUB_DP4: R45.1 U3.6 USBH4.3 | length 84.8
  Top Layer w0.15: U3.6@-45.35,-74.35 -42.55,-74.35 -41.7,-75.2 -41.7,-82 -40.4,-83.3 -23.3,-83.3 -19.887,-79.887 R45.1@-16.241,-79.887 -14.513,-79.887 -13.809,-80.591 ; U3.6@-44.751,-74.414 cw(c-44.598,-74.567) -44.598,-74.35 cw(c-44.598,-74.133) U3.6@-44.751,-74.286 ; U3.6@-44.746,-74.414 cw(c-44.593,-74.567) -44.593,-74.35 cw(c-44.593,-74.133) U3.6@-44.746,-74.286 ; USBH4.3@-12.213,-80.591 -13.809,-80.591 ; U3.6@-44.801,-74.414 cw(c-44.648,-74.567) -44.648,-74.35 ; U3.6@-44.801,-74.414 cw(c-44.648,-74.567) -44.648,-74.35 ; U3.6@-44.801,-74.414 cw(c-44.648,-74.567) -44.648,-74.35 ; U3.6@-44.801,-74.286 ccw(c-44.648,-74.133) -44.648,-74.35 ; U3.6@-44.801,-74.286 ccw(c-44.648,-74.133) -44.648,-74.35 ; U3.6@-44.801,-74.286 ccw(c-44.648,-74.133) -44.648,-74.35 ; -17.107,-79.887 cw(c-17.107,-80.626) R45.1@-16.585,-80.104 ; -17.107,-79.887 ccw(c-17.107,-79.149) R45.1@-16.585,-79.671 ; -17.107,-79.887 cw(c-17.107,-80.626) R45.1@-16.585,-80.104 ; -17.107,-79.887 ccw(c-17.107,-79.149) R45.1@-16.585,-79.671 ; -17.107,-79.887 cw(c-17.107,-80.626) R45.1@-16.585,-80.104 ; -17.107,-79.887 ccw(c-17.107,-79.149) R45.1@-16.585,-79.671 ; -17.107,-79.887 cw(c-17.107,-80.626) R45.1@-16.585,-80.104 ; -17.107,-79.887 ccw(c-17.107,-79.149) R45.1@-16.585,-79.671 ; -17.107,-79.887 ccw(c-17.107,-79.149) R45.1@-16.585,-79.671 ; -17.107,-79.887 cw(c-17.107,-80.626) R45.1@-16.585,-80.104 ; R45.1@-15.898,-80.104 cw(c-15.376,-80.626) -15.376,-79.887 ; R45.1@-15.898,-80.104 cw(c-15.376,-80.626) -15.376,-79.887 ; R45.1@-15.898,-80.104 cw(c-15.376,-80.626) -15.376,-79.887 ; R45.1@-15.898,-80.104 cw(c-15.376,-80.626) -15.376,-79.887 ; R45.1@-15.898,-80.104 cw(c-15.376,-80.626) -15.376,-79.887 ; R45.1@-15.898,-79.671 ccw(c-15.376,-79.149) -15.376,-79.887 ; R45.1@-15.898,-79.671 ccw(c-15.376,-79.149) -15.376,-79.887 ; R45.1@-15.898,-79.671 ccw(c-15.376,-79.149) -15.376,-79.887 ; R45.1@-15.898,-79.671 ccw(c-15.376,-79.149) -15.376,-79.887 ; R45.1@-15.898,-79.671 ccw(c-15.376,-79.149) -15.376,-79.887 ; -13.809,-80.591 cw(c-13.809,-82.139) USBH4.3@-12.698,-81.061 ; -13.809,-80.591 ccw(c-13.809,-79.044) USBH4.3@-12.698,-80.121 ; -13.809,-80.591 cw(c-13.809,-82.139) USBH4.3@-12.698,-81.061 ; -13.809,-80.591 ccw(c-13.809,-79.044) USBH4.3@-12.698,-80.121 ; -13.809,-80.591 cw(c-13.809,-82.139) USBH4.3@-12.698,-81.061 ; -13.809,-80.591 ccw(c-13.809,-79.044) USBH4.3@-12.698,-80.121 ; -13.809,-80.591 cw(c-13.809,-82.139) USBH4.3@-12.698,-81.061 ; -13.809,-80.591 ccw(c-13.809,-79.044) USBH4.3@-12.698,-80.121 ; -13.809,-80.591 ccw(c-13.809,-79.044) USBH4.3@-12.698,-80.121 ; -13.809,-80.591 cw(c-13.809,-82.139) USBH4.3@-12.698,-81.061 ; -13.454,-80.591 cw(c-13.454,-81.795) USBH4.3@-12.59,-80.957 ; -13.454,-80.591 ccw(c-13.454,-79.387) USBH4.3@-12.59,-80.226 ; -13.454,-80.591 cw(c-13.454,-81.795) USBH4.3@-12.59,-80.957 ; -13.454,-80.591 ccw(c-13.454,-79.387) USBH4.3@-12.59,-80.226 ; -13.454,-80.591 cw(c-13.454,-81.795) USBH4.3@-12.59,-80.957 ; -13.454,-80.591 ccw(c-13.454,-79.387) USBH4.3@-12.59,-80.226 ; -13.454,-80.591 cw(c-13.454,-81.795) USBH4.3@-12.59,-80.957 ; -13.454,-80.591 ccw(c-13.454,-79.387) USBH4.3@-12.59,-80.226 ; -13.454,-80.591 ccw(c-13.454,-79.387) USBH4.3@-12.59,-80.226 ; -13.454,-80.591 cw(c-13.454,-81.795) USBH4.3@-12.59,-80.957 ; -13.1,-80.591 cw(c-13.1,-81.451) USBH4.3@-12.483,-80.852 ; -13.1,-80.591 ccw(c-13.1,-79.731) USBH4.3@-12.483,-80.33 ; -13.1,-80.591 cw(c-13.1,-81.451) USBH4.3@-12.483,-80.852 ; -13.1,-80.591 ccw(c-13.1,-79.731) USBH4.3@-12.483,-80.33 ; -13.1,-80.591 cw(c-13.1,-81.451) USBH4.3@-12.483,-80.852 ; -13.1,-80.591 ccw(c-13.1,-79.731) USBH4.3@-12.483,-80.33 ; -13.1,-80.591 cw(c-13.1,-81.451) USBH4.3@-12.483,-80.852 ; -13.1,-80.591 ccw(c-13.1,-79.731) USBH4.3@-12.483,-80.33 ; -13.1,-80.591 ccw(c-13.1,-79.731) USBH4.3@-12.483,-80.33 ; -13.1,-80.591 cw(c-13.1,-81.451) USBH4.3@-12.483,-80.852
TCK: J1.38 JTAG1.9 R14.2 | length 147.4
  Top Layer w0.15: v1@-136.388,-14.388 cw(c-136.602,-14.602) -136.3,-14.602 cw(c-135.998,-14.602) v1@-136.212,-14.388 ; v1(-136.3,-14.3) -136.3,-18.2 -132.2,-22.3 -132.2,-28.1 -130.9,-29.4 v1(-130.9,-51.3) -130.9,-55.5 -130.6,-55.8 -128.1,-55.8 -127.825,-56.075 R14.2@-127.825,-57.2 ; v1@-130.988,-51.388 cw(c-131.202,-51.602) -130.9,-51.602 cw(c-130.598,-51.602) v1@-130.812,-51.388 ; v1@-130.988,-51.212 ccw(c-131.202,-50.998) -130.9,-50.998 ccw(c-130.598,-50.998) v1@-130.812,-51.212 ; -128.295,-56.805 R14.2@-127.825,-57.275 ; v1@-136.424,-14.424 cw(c-136.722,-14.722) -136.3,-14.722 ; v1@-136.424,-14.424 cw(c-136.722,-14.722) -136.3,-14.722 ; v1@-136.424,-14.424 cw(c-136.722,-14.722) -136.3,-14.722 ; v1@-136.424,-14.424 cw(c-136.722,-14.722) -136.3,-14.722 ; -136.3,-14.722 cw(c-135.878,-14.722) v1@-136.176,-14.424 ; -136.3,-14.722 cw(c-135.878,-14.722) v1@-136.176,-14.424 ; -136.3,-14.722 cw(c-135.878,-14.722) v1@-136.176,-14.424 ; -136.3,-14.722 cw(c-135.878,-14.722) v1@-136.176,-14.424 ; v1@-131.024,-51.424 cw(c-131.322,-51.722) -130.9,-51.722 ; v1@-131.024,-51.424 cw(c-131.322,-51.722) -130.9,-51.722 ; v1@-131.024,-51.424 cw(c-131.322,-51.722) -130.9,-51.722 ; v1@-131.024,-51.424 cw(c-131.322,-51.722) -130.9,-51.722 ; v1@-131.024,-51.176 ccw(c-131.322,-50.878) -130.9,-50.878 ; v1@-131.024,-51.176 ccw(c-131.322,-50.878) -130.9,-50.878 ; v1@-131.024,-51.176 ccw(c-131.322,-50.878) -130.9,-50.878 ; v1@-131.024,-51.176 ccw(c-131.322,-50.878) -130.9,-50.878 ; -130.9,-51.722 cw(c-130.478,-51.722) v1@-130.776,-51.424 ; -130.9,-51.722 cw(c-130.478,-51.722) v1@-130.776,-51.424 ; -130.9,-51.722 cw(c-130.478,-51.722) v1@-130.776,-51.424 ; -130.9,-51.722 cw(c-130.478,-51.722) v1@-130.776,-51.424 ; -130.9,-50.878 ccw(c-130.478,-50.878) v1@-130.776,-51.176 ; -130.9,-50.878 ccw(c-130.478,-50.878) v1@-130.776,-51.176 ; -130.9,-50.878 ccw(c-130.478,-50.878) v1@-130.776,-51.176 ; -130.9,-50.878 ccw(c-130.478,-50.878) v1@-130.776,-51.176 ; -128.321,-56.779 cw(c-128.548,-57.005) R14.2@-128.243,-57.105 ; -128.321,-56.779 ccw(c-128.032,-56.49) R14.2@-127.987,-56.896 ; -128.321,-56.779 cw(c-128.548,-57.005) R14.2@-128.243,-57.105 ; -128.321,-56.779 ccw(c-128.032,-56.49) R14.2@-127.987,-56.896 ; -128.321,-56.779 cw(c-128.548,-57.005) R14.2@-128.243,-57.105 ; -128.321,-56.779 ccw(c-128.032,-56.49) R14.2@-127.987,-56.896 ; -128.321,-56.779 cw(c-128.548,-57.005) R14.2@-128.243,-57.105 ; -128.321,-56.779 ccw(c-128.032,-56.49) R14.2@-127.987,-56.896 ; -128.321,-56.779 ccw(c-128.032,-56.49) R14.2@-127.987,-56.896 ; -128.321,-56.779 cw(c-128.548,-57.005) R14.2@-128.243,-57.105 ; R14.2@-128.042,-56.984 ccw(c-128.564,-56.461) -127.825,-56.461 ; R14.2@-128.042,-56.984 ccw(c-128.564,-56.461) -127.825,-56.461 ; R14.2@-128.042,-56.984 ccw(c-128.564,-56.461) -127.825,-56.461 ; R14.2@-128.042,-56.984 ccw(c-128.564,-56.461) -127.825,-56.461 ; R14.2@-128.042,-56.984 ccw(c-128.564,-56.461) -127.825,-56.461 ; -127.825,-56.461 ccw(c-127.087,-56.461) R14.2@-127.609,-56.984 ; -127.825,-56.461 ccw(c-127.087,-56.461) R14.2@-127.609,-56.984 ; -127.825,-56.461 ccw(c-127.087,-56.461) R14.2@-127.609,-56.984 ; -127.825,-56.461 ccw(c-127.087,-56.461) R14.2@-127.609,-56.984 ; -127.825,-56.461 ccw(c-127.087,-56.461) R14.2@-127.609,-56.984
  Bottom Layer w0.15: JTAG1.9@-147.099,-16.403 -147.099,-15.199 ; v1@-136.388,-14.388 ccw(c-136.602,-14.602) -136.602,-14.3 ccw(c-136.602,-13.998) v1@-136.388,-14.212 ; v1(-136.3,-14.3) -146.2,-14.3 -147.099,-15.199 ; v1@-130.95,-51.25 v1(-130.9,-51.3) -114.346,-67.854 -106.216,-67.854 J1.38@-105.571,-68.499 ; v1@-130.9,-51.425 cw(c-130.9,-51.727) -130.687,-51.513 cw(c-130.473,-51.3) v1@-130.775,-51.3 ; -106.196,-67.889 J1.38@-105.571,-68.514 ; JTAG1.9@-147.456,-16.018 ccw(c-148.216,-15.199) -147.099,-15.199 ; JTAG1.9@-147.456,-16.018 ccw(c-148.216,-15.199) -147.099,-15.199 ; JTAG1.9@-147.456,-16.018 ccw(c-148.216,-15.199) -147.099,-15.199 ; JTAG1.9@-147.456,-16.018 ccw(c-148.216,-15.199) -147.099,-15.199 ; JTAG1.9@-147.456,-16.018 ccw(c-148.216,-15.199) -147.099,-15.199 ; JTAG1.9@-147.354,-16.128 ccw(c-147.897,-15.543) -147.099,-15.543 ; JTAG1.9@-147.354,-16.128 ccw(c-147.897,-15.543) -147.099,-15.543 ; JTAG1.9@-147.354,-16.128 ccw(c-147.897,-15.543) -147.099,-15.543 ; JTAG1.9@-147.354,-16.128 ccw(c-147.897,-15.543) -147.099,-15.543 ; JTAG1.9@-147.354,-16.128 ccw(c-147.897,-15.543) -147.099,-15.543 ; -147.099,-15.543 ccw(c-146.301,-15.543) JTAG1.9@-146.844,-16.128 ; -147.099,-15.543 ccw(c-146.301,-15.543) JTAG1.9@-146.844,-16.128 ; -147.099,-15.543 ccw(c-146.301,-15.543) JTAG1.9@-146.844,-16.128 ; -147.099,-15.543 ccw(c-146.301,-15.543) JTAG1.9@-146.844,-16.128 ; -147.099,-15.543 ccw(c-146.301,-15.543) JTAG1.9@-146.844,-16.128 ; -147.099,-15.199 ccw(c-145.981,-15.199) JTAG1.9@-146.742,-16.018 ; -147.099,-15.199 ccw(c-145.981,-15.199) JTAG1.9@-146.742,-16.018 ; -147.099,-15.199 ccw(c-145.981,-15.199) JTAG1.9@-146.742,-16.018 ; -147.099,-15.199 ccw(c-145.981,-15.199) JTAG1.9@-146.742,-16.018 ; -147.099,-15.199 ccw(c-145.981,-15.199) JTAG1.9@-146.742,-16.018 ; -136.722,-14.3 cw(c-136.722,-14.722) v1@-136.424,-14.424 ; -136.722,-14.3 ccw(c-136.722,-13.878) v1@-136.424,-14.176 ; -136.722,-14.3 cw(c-136.722,-14.722) v1@-136.424,-14.424 ; -136.722,-14.3 ccw(c-136.722,-13.878) v1@-136.424,-14.176 ; -136.722,-14.3 cw(c-136.722,-14.722) v1@-136.424,-14.424 ; -136.722,-14.3 ccw(c-136.722,-13.878) v1@-136.424,-14.176 ; -136.722,-14.3 ccw(c-136.722,-13.878) v1@-136.424,-14.176 ; -136.722,-14.3 cw(c-136.722,-14.722) v1@-136.424,-14.424 ; v1@-130.9,-51.475 cw(c-130.9,-51.897) -130.601,-51.599 ; v1@-130.9,-51.475 cw(c-130.9,-51.897) -130.601,-51.599 ; v1@-130.9,-51.475 cw(c-130.9,-51.897) -130.601,-51.599 ; v1@-130.9,-51.475 cw(c-130.9,-51.897) -130.601,-51.599 ; v1@-130.725,-51.3 ccw(c-130.303,-51.3) -130.601,-51.599 ; v1@-130.725,-51.3 ccw(c-130.303,-51.3) -130.601,-51.599 ; v1@-130.725,-51.3 ccw(c-130.303,-51.3) -130.601,-51.599 ; v1@-130.725,-51.3 ccw(c-130.303,-51.3) -130.601,-51.599 ; -106.126,-67.959 cw(c-106.68,-68.514) J1.38@-105.896,-68.514 ; -106.126,-67.959 ccw(c-105.571,-67.405) J1.38@-105.571,-68.189 ; -106.126,-67.959 cw(c-106.68,-68.514) J1.38@-105.896,-68.514 ; -106.126,-67.959 ccw(c-105.571,-67.405) J1.38@-105.571,-68.189 ; -106.126,-67.959 cw(c-106.68,-68.514) J1.38@-105.896,-68.514 ; -106.126,-67.959 ccw(c-105.571,-67.405) J1.38@-105.571,-68.189 ; J1.38@-105.946,-68.499 ccw(c-106.851,-68.499) -106.211,-67.859 cw(c-106.851,-68.499) J1.38@-105.946,-68.499 ; J1.38@-105.946,-68.499 ccw(c-106.815,-68.499) -106.2,-67.885 cw(c-106.815,-68.499) J1.38@-105.946,-68.499 ; J1.38@-105.87,-68.215 cw(c-106.168,-68.514) J1.38@-105.746,-68.514 ; J1.38@-105.87,-68.215 ccw(c-105.571,-67.917) J1.38@-105.571,-68.339 ; J1.38@-105.87,-68.215 cw(c-106.168,-68.514) J1.38@-105.746,-68.514 ; J1.38@-105.87,-68.215 ccw(c-105.571,-67.917) J1.38@-105.571,-68.339 ; J1.38@-105.87,-68.215 cw(c-106.168,-68.514) J1.38@-105.746,-68.514 ; J1.38@-105.87,-68.215 ccw(c-105.571,-67.917) J1.38@-105.571,-68.339 ; J1.38@-105.796,-68.499 ccw(c-106.339,-68.499) -105.955,-68.115 cw(c-106.339,-68.499) J1.38@-105.796,-68.499 ; J1.38@-105.796,-68.499 ccw(c-106.303,-68.499) -105.944,-68.141 cw(c-106.303,-68.499) J1.38@-105.796,-68.499 ; J1.38@-105.621,-68.174 cw(c-105.621,-67.51) -106.09,-67.98 ccw(c-105.621,-67.51) J1.38@-105.621,-68.174 ; J1.38@-105.621,-68.174 cw(c-105.621,-67.475) -106.116,-67.969 ccw(c-105.621,-67.475) J1.38@-105.621,-68.174
TDI: J1.36 JTAG1.5 R16.2 | length 125.2
  Top Layer w0.15: JTAG1.5@-143.099,-16.403 -142.1,-17.401 -142.1,-19.2 -141.427,-19.873 -135.327,-19.873 -132.7,-22.5 -132.7,-28.4 -131.7,-29.4 -131.7,-50.9 -131.7,-55.8 -131.3,-56.2 -130.136,-56.2 -129.91,-56.426 R16.2@-129.91,-57.2 ; v1@-131.788,-49.788 cw(c-132.002,-50.002) -131.7,-50.002 cw(c-131.398,-50.002) v1@-131.612,-49.788 ; v1@-131.788,-49.612 ccw(c-132.002,-49.398) -131.7,-49.398 ccw(c-131.398,-49.398) v1@-131.612,-49.612 ; JTAG1.5@-143.099,-16.928 cw(c-143.099,-18.195) -142.203,-17.299 ; JTAG1.5@-143.099,-16.928 cw(c-143.099,-18.195) -142.203,-17.299 ; JTAG1.5@-143.099,-16.928 cw(c-143.099,-18.195) -142.203,-17.299 ; JTAG1.5@-143.099,-16.928 cw(c-143.099,-18.195) -142.203,-17.299 ; JTAG1.5@-143.099,-16.928 cw(c-143.099,-18.195) -142.203,-17.299 ; JTAG1.5@-143.099,-16.778 cw(c-143.099,-17.683) -142.459,-17.043 ; JTAG1.5@-143.099,-16.778 cw(c-143.099,-17.683) -142.459,-17.043 ; JTAG1.5@-143.099,-16.778 cw(c-143.099,-17.683) -142.459,-17.043 ; JTAG1.5@-143.099,-16.778 cw(c-143.099,-17.683) -142.459,-17.043 ; JTAG1.5@-143.099,-16.778 cw(c-143.099,-17.683) -142.459,-17.043 ; JTAG1.5@-142.724,-16.403 ccw(c-141.818,-16.403) -142.459,-17.043 ; JTAG1.5@-142.724,-16.403 ccw(c-141.818,-16.403) -142.459,-17.043 ; JTAG1.5@-142.724,-16.403 ccw(c-141.818,-16.403) -142.459,-17.043 ; JTAG1.5@-142.724,-16.403 ccw(c-141.818,-16.403) -142.459,-17.043 ; JTAG1.5@-142.724,-16.403 ccw(c-141.818,-16.403) -142.459,-17.043 ; JTAG1.5@-142.574,-16.403 ccw(c-141.306,-16.403) -142.203,-17.299 ; JTAG1.5@-142.574,-16.403 ccw(c-141.306,-16.403) -142.203,-17.299 ; JTAG1.5@-142.574,-16.403 ccw(c-141.306,-16.403) -142.203,-17.299 ; JTAG1.5@-142.574,-16.403 ccw(c-141.306,-16.403) -142.203,-17.299 ; JTAG1.5@-142.574,-16.403 ccw(c-141.306,-16.403) -142.203,-17.299 ; v1@-131.824,-49.824 cw(c-132.122,-50.122) -131.7,-50.122 ; v1@-131.824,-49.824 cw(c-132.122,-50.122) -131.7,-50.122 ; v1@-131.824,-49.824 cw(c-132.122,-50.122) -131.7,-50.122 ; v1@-131.824,-49.824 cw(c-132.122,-50.122) -131.7,-50.122 ; v1@-131.824,-49.576 ccw(c-132.122,-49.278) -131.7,-49.278 ; v1@-131.824,-49.576 ccw(c-132.122,-49.278) -131.7,-49.278 ; v1@-131.824,-49.576 ccw(c-132.122,-49.278) -131.7,-49.278 ; v1@-131.824,-49.576 ccw(c-132.122,-49.278) -131.7,-49.278 ; -131.7,-50.122 cw(c-131.278,-50.122) v1@-131.576,-49.824 ; -131.7,-50.122 cw(c-131.278,-50.122) v1@-131.576,-49.824 ; -131.7,-50.122 cw(c-131.278,-50.122) v1@-131.576,-49.824 ; -131.7,-50.122 cw(c-131.278,-50.122) v1@-131.576,-49.824 ; -131.7,-49.278 ccw(c-131.278,-49.278) v1@-131.576,-49.576 ; -131.7,-49.278 ccw(c-131.278,-49.278) v1@-131.576,-49.576 ; -131.7,-49.278 ccw(c-131.278,-49.278) v1@-131.576,-49.576 ; -131.7,-49.278 ccw(c-131.278,-49.278) v1@-131.576,-49.576 ; R16.2@-130.126,-56.984 ccw(c-130.649,-56.461) -129.91,-56.461 ; R16.2@-130.126,-56.984 ccw(c-130.649,-56.461) -129.91,-56.461 ; R16.2@-130.126,-56.984 ccw(c-130.649,-56.461) -129.91,-56.461 ; R16.2@-130.126,-56.984 ccw(c-130.649,-56.461) -129.91,-56.461 ; R16.2@-130.126,-56.984 ccw(c-130.649,-56.461) -129.91,-56.461 ; -129.91,-56.461 ccw(c-129.171,-56.461) R16.2@-129.694,-56.984 ; -129.91,-56.461 ccw(c-129.171,-56.461) R16.2@-129.694,-56.984 ; -129.91,-56.461 ccw(c-129.171,-56.461) R16.2@-129.694,-56.984 ; -129.91,-56.461 ccw(c-129.171,-56.461) R16.2@-129.694,-56.984 ; -129.91,-56.461 ccw(c-129.171,-56.461) R16.2@-129.694,-56.984
  Bottom Layer w0.15: v1@-131.75,-49.65 -114.8,-66.6 -106.214,-66.6 J1.36@-105.571,-67.243 ; v1@-131.7,-49.825 cw(c-131.7,-50.127) -131.487,-49.913 cw(c-131.273,-49.7) v1@-131.575,-49.7 ; v1@-131.7,-49.875 cw(c-131.7,-50.297) -131.401,-49.999 ; v1@-131.7,-49.875 cw(c-131.7,-50.297) -131.401,-49.999 ; v1@-131.7,-49.875 cw(c-131.7,-50.297) -131.401,-49.999 ; v1@-131.7,-49.875 cw(c-131.7,-50.297) -131.401,-49.999 ; v1@-131.525,-49.7 ccw(c-131.103,-49.7) -131.401,-49.999 ; v1@-131.525,-49.7 ccw(c-131.103,-49.7) -131.401,-49.999 ; v1@-131.525,-49.7 ccw(c-131.103,-49.7) -131.401,-49.999 ; v1@-131.525,-49.7 ccw(c-131.103,-49.7) -131.401,-49.999 ; -106.126,-66.689 cw(c-106.68,-67.243) J1.36@-105.896,-67.243 ; -106.126,-66.689 ccw(c-105.571,-66.134) J1.36@-105.571,-66.918 ; -106.126,-66.689 cw(c-106.68,-67.243) J1.36@-105.896,-67.243 ; -106.126,-66.689 ccw(c-105.571,-66.134) J1.36@-105.571,-66.918 ; -106.126,-66.689 cw(c-106.68,-67.243) J1.36@-105.896,-67.243 ; -106.126,-66.689 ccw(c-105.571,-66.134) J1.36@-105.571,-66.918 ; J1.36@-105.87,-66.945 cw(c-106.168,-67.243) J1.36@-105.746,-67.243 ; J1.36@-105.87,-66.945 ccw(c-105.571,-66.646) J1.36@-105.571,-67.068 ; J1.36@-105.87,-66.945 cw(c-106.168,-67.243) J1.36@-105.746,-67.243 ; J1.36@-105.87,-66.945 ccw(c-105.571,-66.646) J1.36@-105.571,-67.068 ; J1.36@-105.87,-66.945 cw(c-106.168,-67.243) J1.36@-105.746,-67.243 ; J1.36@-105.87,-66.945 ccw(c-105.571,-66.646) J1.36@-105.571,-67.068 ; -106.201,-66.613 cw(c-106.817,-67.229) -105.946,-67.229 ccw(c-106.817,-67.229) -106.201,-66.613 ; -106.114,-66.7 ccw(c-105.621,-66.207) -105.621,-66.904 cw(c-105.621,-66.207) -106.114,-66.7 ; -105.945,-66.869 cw(c-106.305,-67.229) -105.796,-67.229 ccw(c-106.305,-67.229) -105.945,-66.869
  other v1: -131.7,-49.7
TDO: J1.37 JTAG1.6 | length 106.2
  Top Layer w0.15: JTAG1.6@-143.099,-18.403 -143.099,-20.501 -142.3,-21.3 -135.2,-21.3 -133.7,-22.8 -133.7,-29 -133.306,-29.394 v1(-133.306,-49.647) ; v1@-133.394,-49.559 ccw(c-133.608,-49.345) -133.306,-49.345 ccw(c-133.004,-49.345) v1@-133.217,-49.559 ; JTAG1.6@-143.47,-18.774 cw(c-144.366,-19.67) -143.099,-19.67 ; JTAG1.6@-143.47,-18.774 cw(c-144.366,-19.67) -143.099,-19.67 ; JTAG1.6@-143.47,-18.774 cw(c-144.366,-19.67) -143.099,-19.67 ; JTAG1.6@-143.47,-18.774 cw(c-144.366,-19.67) -143.099,-19.67 ; JTAG1.6@-143.47,-18.774 cw(c-144.366,-19.67) -143.099,-19.67 ; JTAG1.6@-143.364,-18.668 cw(c-144.004,-19.308) -143.099,-19.308 ; JTAG1.6@-143.364,-18.668 cw(c-144.004,-19.308) -143.099,-19.308 ; JTAG1.6@-143.364,-18.668 cw(c-144.004,-19.308) -143.099,-19.308 ; JTAG1.6@-143.364,-18.668 cw(c-144.004,-19.308) -143.099,-19.308 ; JTAG1.6@-143.364,-18.668 cw(c-144.004,-19.308) -143.099,-19.308 ; -143.099,-19.67 cw(c-141.831,-19.67) JTAG1.6@-142.728,-18.774 ; -143.099,-19.67 cw(c-141.831,-19.67) JTAG1.6@-142.728,-18.774 ; -143.099,-19.67 cw(c-141.831,-19.67) JTAG1.6@-142.728,-18.774 ; -143.099,-19.67 cw(c-141.831,-19.67) JTAG1.6@-142.728,-18.774 ; -143.099,-19.67 cw(c-141.831,-19.67) JTAG1.6@-142.728,-18.774 ; -143.099,-19.308 cw(c-142.193,-19.308) JTAG1.6@-142.834,-18.668 ; -143.099,-19.308 cw(c-142.193,-19.308) JTAG1.6@-142.834,-18.668 ; -143.099,-19.308 cw(c-142.193,-19.308) JTAG1.6@-142.834,-18.668 ; -143.099,-19.308 cw(c-142.193,-19.308) JTAG1.6@-142.834,-18.668 ; -143.099,-19.308 cw(c-142.193,-19.308) JTAG1.6@-142.834,-18.668 ; v1@-133.43,-49.523 ccw(c-133.728,-49.225) -133.306,-49.225 ; v1@-133.43,-49.523 ccw(c-133.728,-49.225) -133.306,-49.225 ; v1@-133.43,-49.523 ccw(c-133.728,-49.225) -133.306,-49.225 ; v1@-133.43,-49.523 ccw(c-133.728,-49.225) -133.306,-49.225 ; -133.306,-49.225 ccw(c-132.883,-49.225) v1@-133.182,-49.523 ; -133.306,-49.225 ccw(c-132.883,-49.225) v1@-133.182,-49.523 ; -133.306,-49.225 ccw(c-132.883,-49.225) v1@-133.182,-49.523 ; -133.306,-49.225 ccw(c-132.883,-49.225) v1@-133.182,-49.523
  Bottom Layer w0.15: v1@-133.306,-49.772 cw(c-133.306,-49.96) v1@-133.173,-49.827 ; v1(-133.306,-49.647) -133.306,-49.694 -128.2,-54.8 -115.286,-68.514 J1.37@-106.841,-68.514 ; v1@-133.181,-49.647 ccw(c-132.765,-49.647) -133.059,-49.941 ; v1@-133.306,-49.822 cw(c-133.306,-50.131) -133.087,-49.913 ; v1@-133.306,-49.822 cw(c-133.306,-50.131) -133.087,-49.913 ; v1@-133.306,-49.822 cw(c-133.306,-50.131) -133.087,-49.913 ; v1@-133.306,-49.822 cw(c-133.306,-50.131) -133.087,-49.913 ; v1@-133.131,-49.647 ccw(c-132.595,-49.647) -132.974,-50.026 ; v1@-133.131,-49.647 ccw(c-132.595,-49.647) -132.974,-50.026 ; v1@-133.131,-49.647 ccw(c-132.595,-49.647) -132.974,-50.026 ; v1@-133.131,-49.647 ccw(c-132.595,-49.647) -132.974,-50.026 ; -107.625,-68.514 cw(c-107.625,-69.299) J1.37@-107.071,-68.744 ; -107.625,-68.514 ccw(c-107.625,-67.73) J1.37@-107.071,-68.284 ; -107.625,-68.514 cw(c-107.625,-69.299) J1.37@-107.071,-68.744 ; -107.625,-68.514 ccw(c-107.625,-67.73) J1.37@-107.071,-68.284 ; -107.625,-68.514 cw(c-107.625,-69.299) J1.37@-107.071,-68.744 ; -107.625,-68.514 ccw(c-107.625,-67.73) J1.37@-107.071,-68.284 ; J1.37@-107.263,-68.514 cw(c-107.263,-68.937) J1.37@-106.965,-68.638 ; J1.37@-107.263,-68.514 ccw(c-107.263,-68.092) J1.37@-106.965,-68.39 ; J1.37@-107.263,-68.514 cw(c-107.263,-68.937) J1.37@-106.965,-68.638 ; J1.37@-107.263,-68.514 ccw(c-107.263,-68.092) J1.37@-106.965,-68.39 ; J1.37@-107.263,-68.514 cw(c-107.263,-68.937) J1.37@-106.965,-68.638 ; J1.37@-107.263,-68.514 ccw(c-107.263,-68.092) J1.37@-106.965,-68.39 ; -107.711,-68.514 ccw(c-107.711,-67.679) -107.121,-68.27 cw(c-107.711,-67.679) -107.711,-68.514 ; -107.64,-68.514 cw(c-107.64,-69.248) -107.121,-68.729 ccw(c-107.64,-69.248) -107.64,-68.514 ; -107.349,-68.514 ccw(c-107.349,-68.041) -107.015,-68.376 cw(c-107.349,-68.041) -107.349,-68.514